# Altium PCB MB.PcbDoc
Units mil, origin at the board's own origin, x right, y up, seen from the top; angles counter-clockwise.
Board outline 4133.86 x 4921.26 mil, 4 copper layers (Digital Layer, nMO Layer, MO Layer, GND Layer), stack 39.843 mil thick; 61 components, 78 nets, 387 pads, 0 vias.
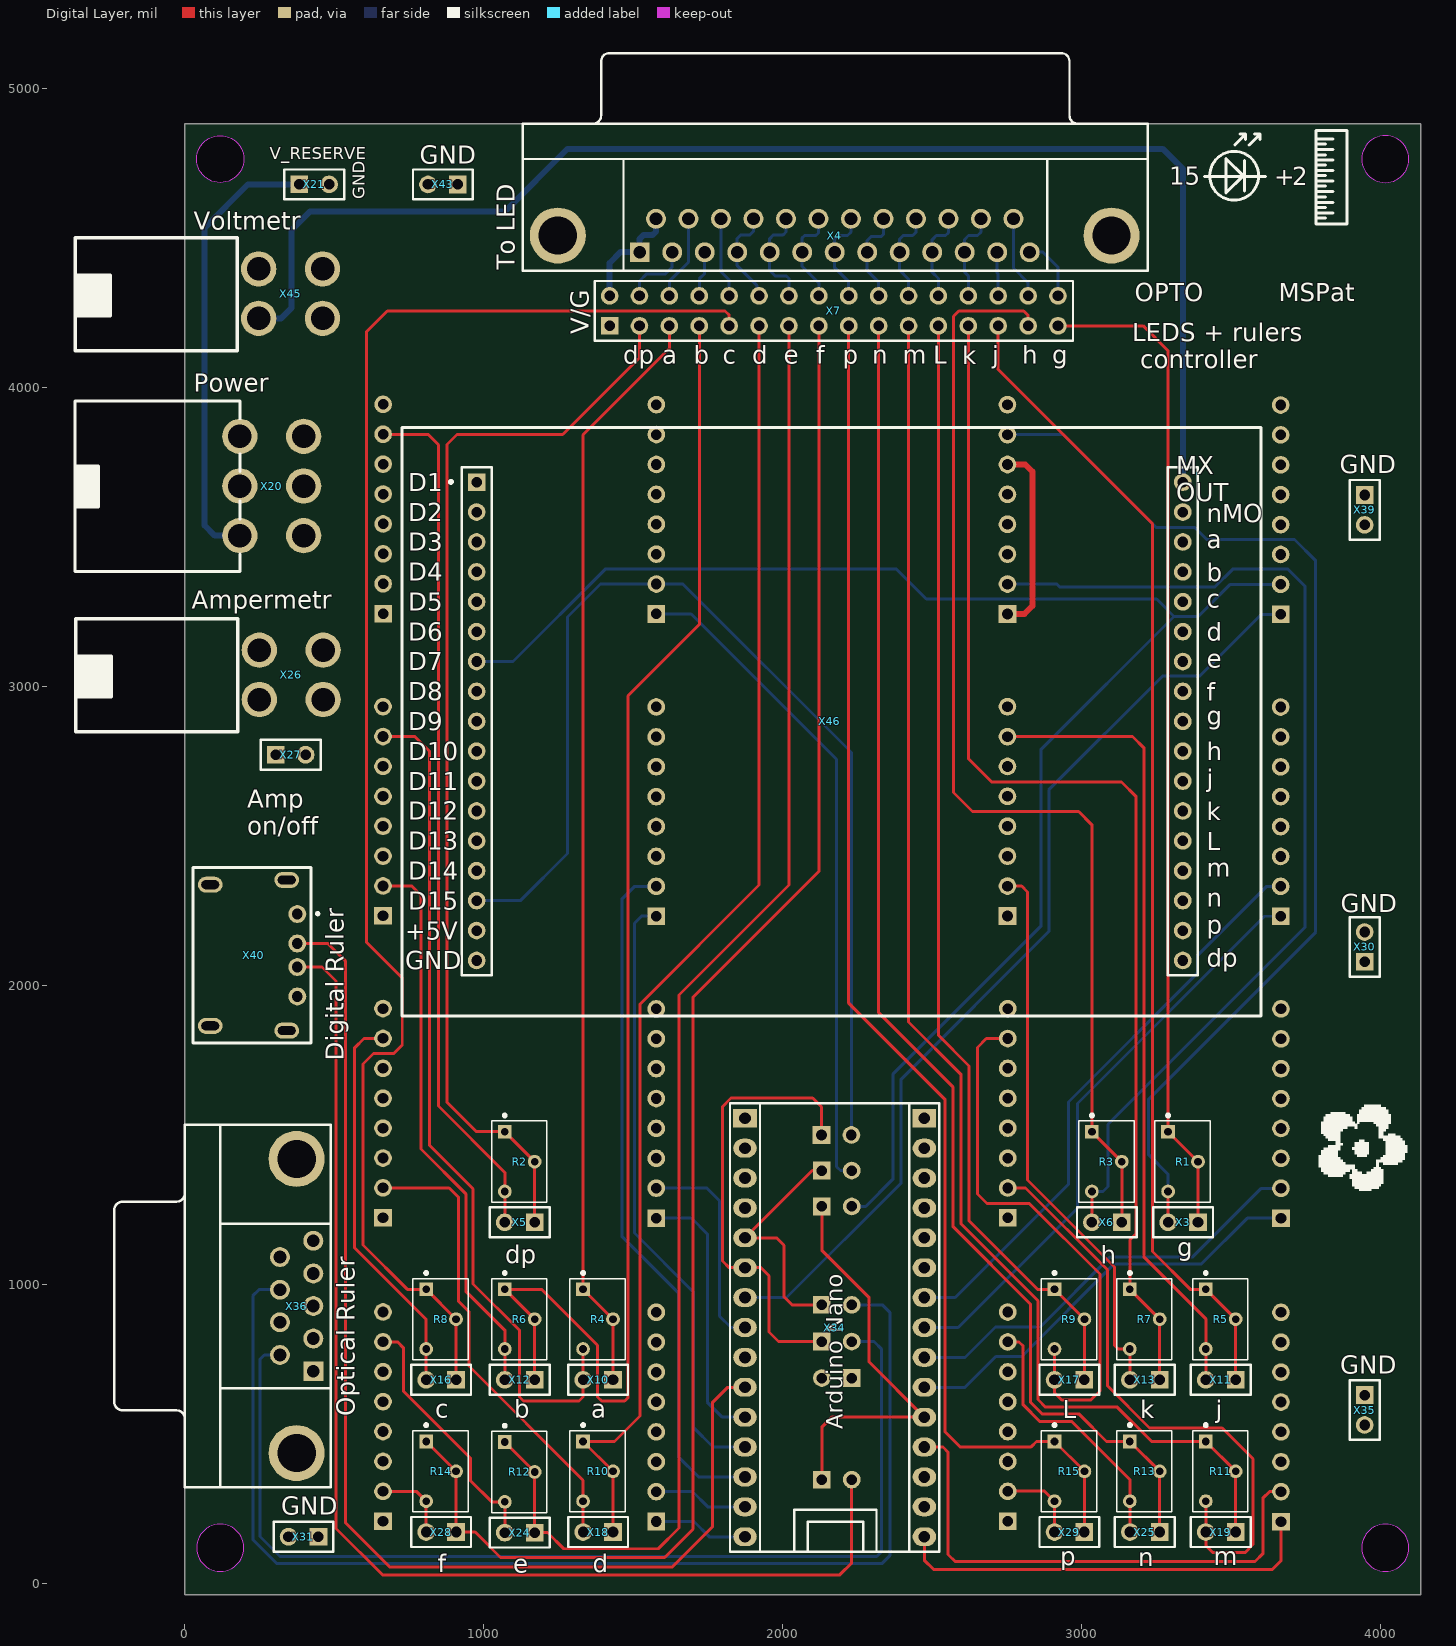
[diagram p0: Digital Layer view]
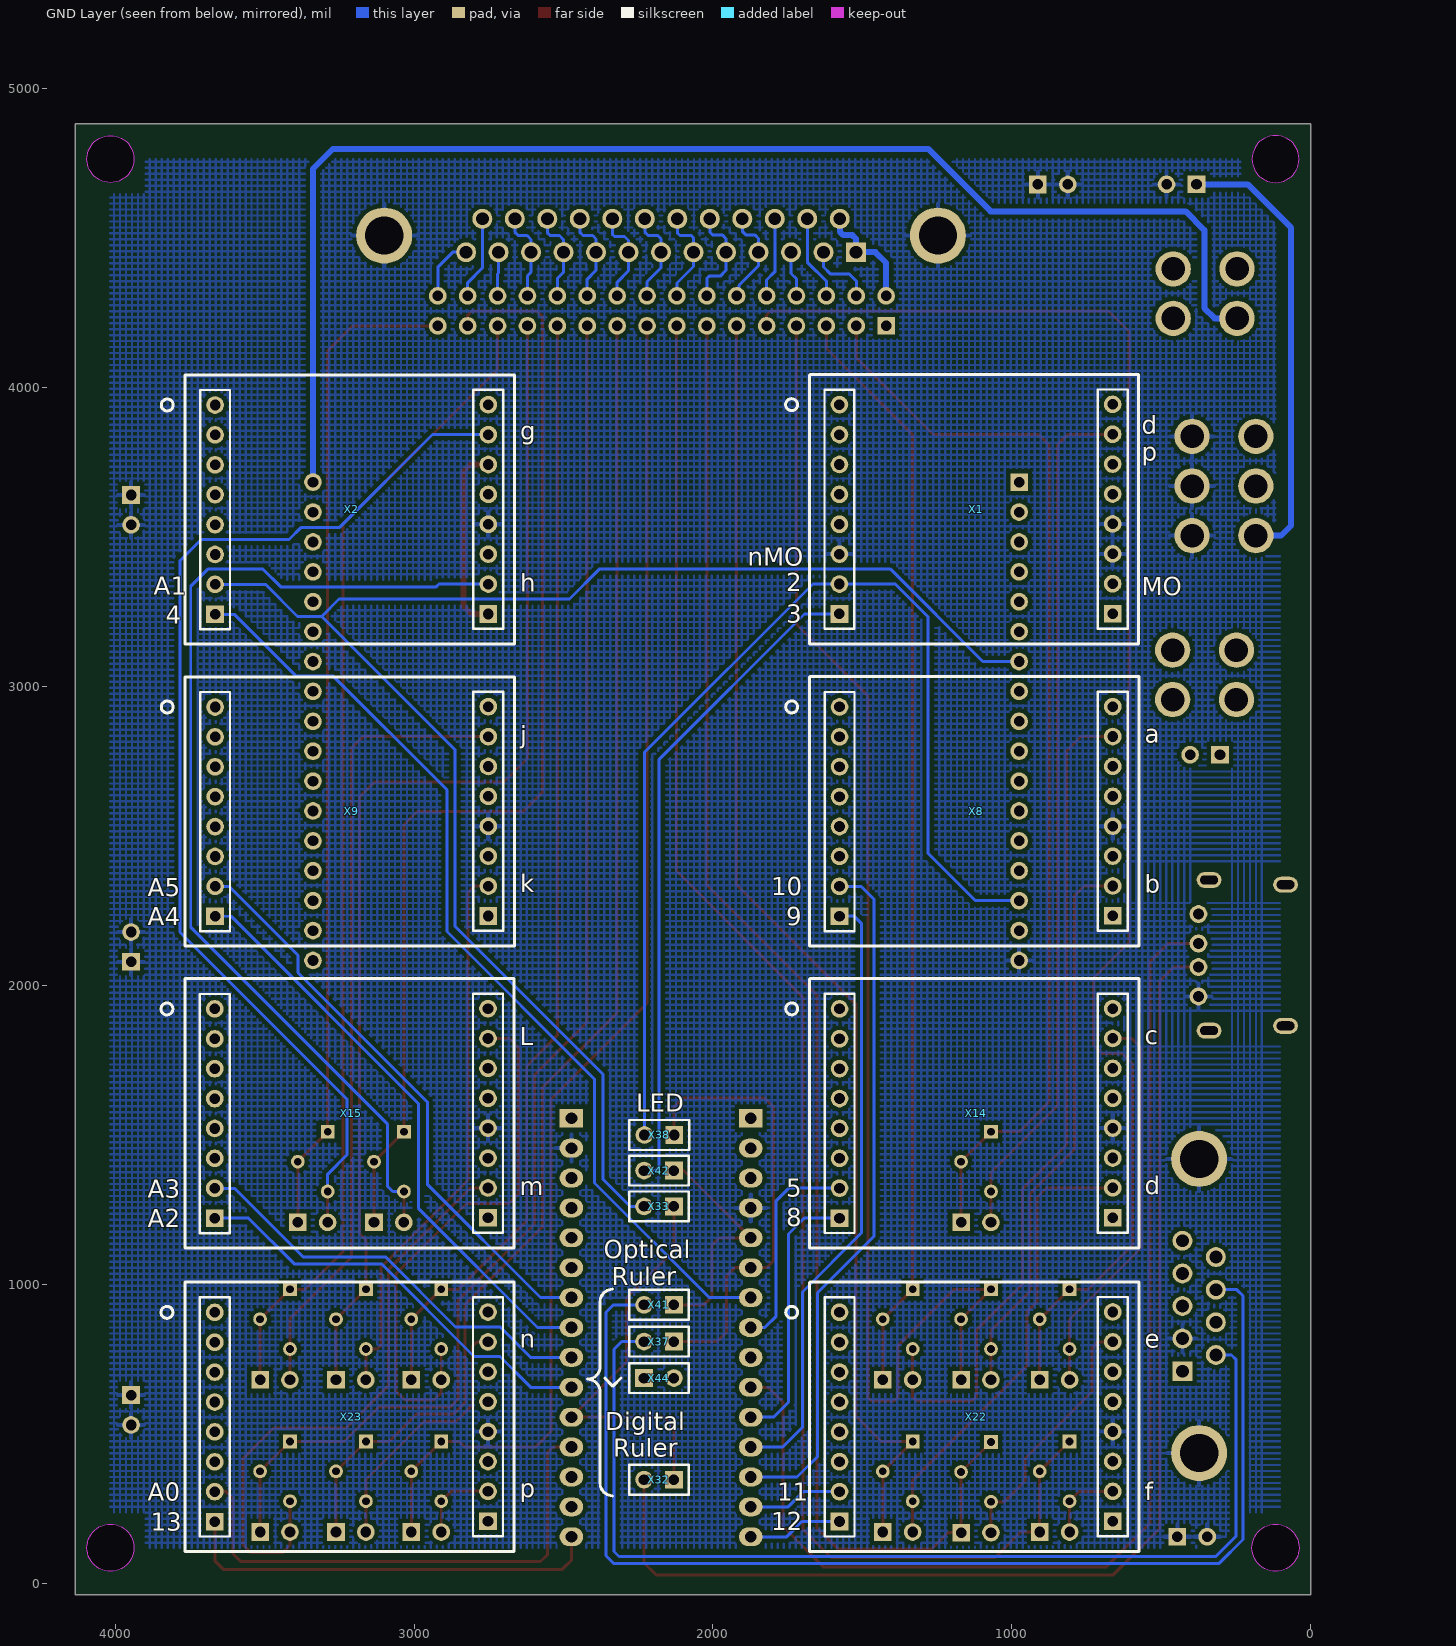
[diagram p1: GND Layer view, seen from below]
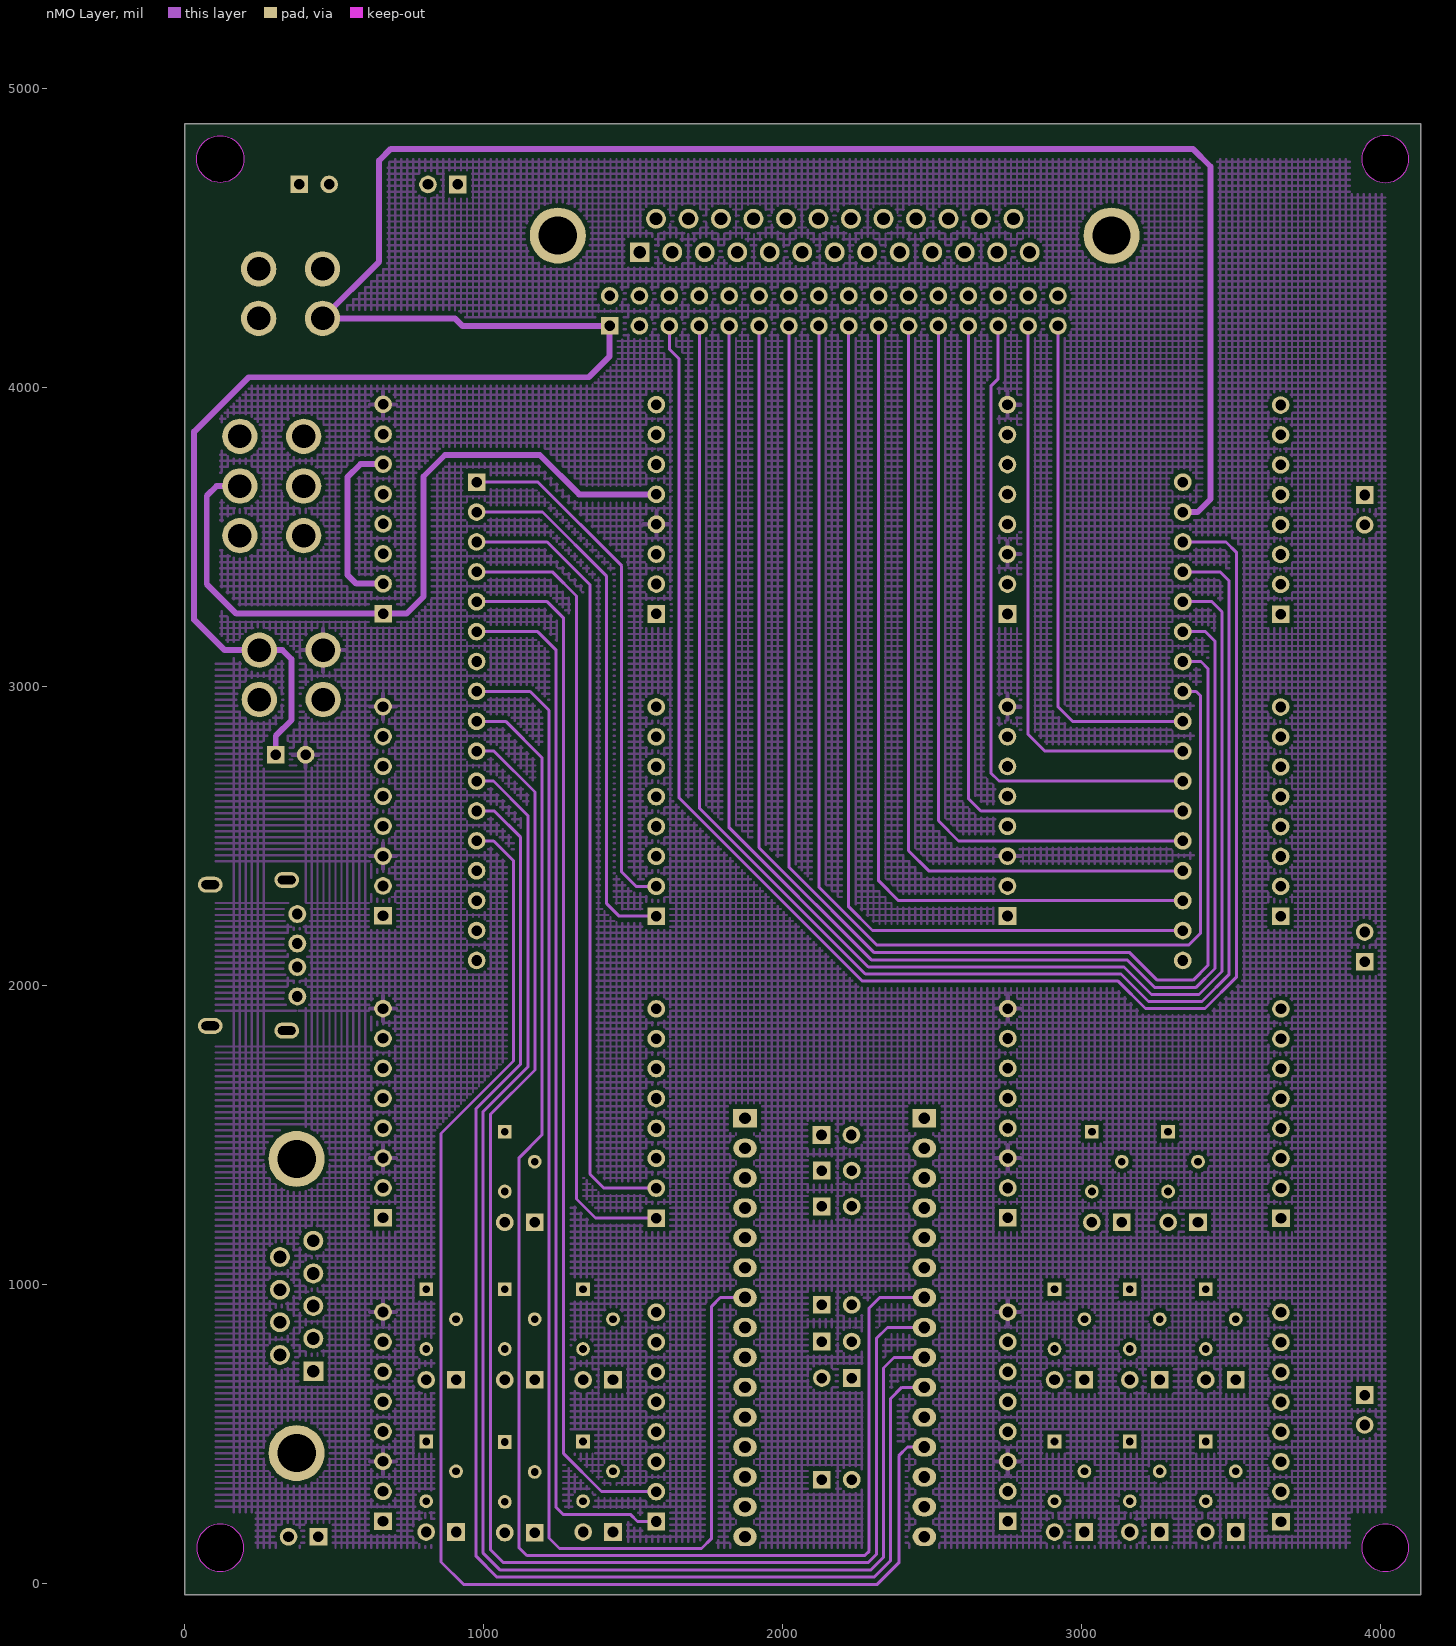
[diagram p2: nMO Layer]
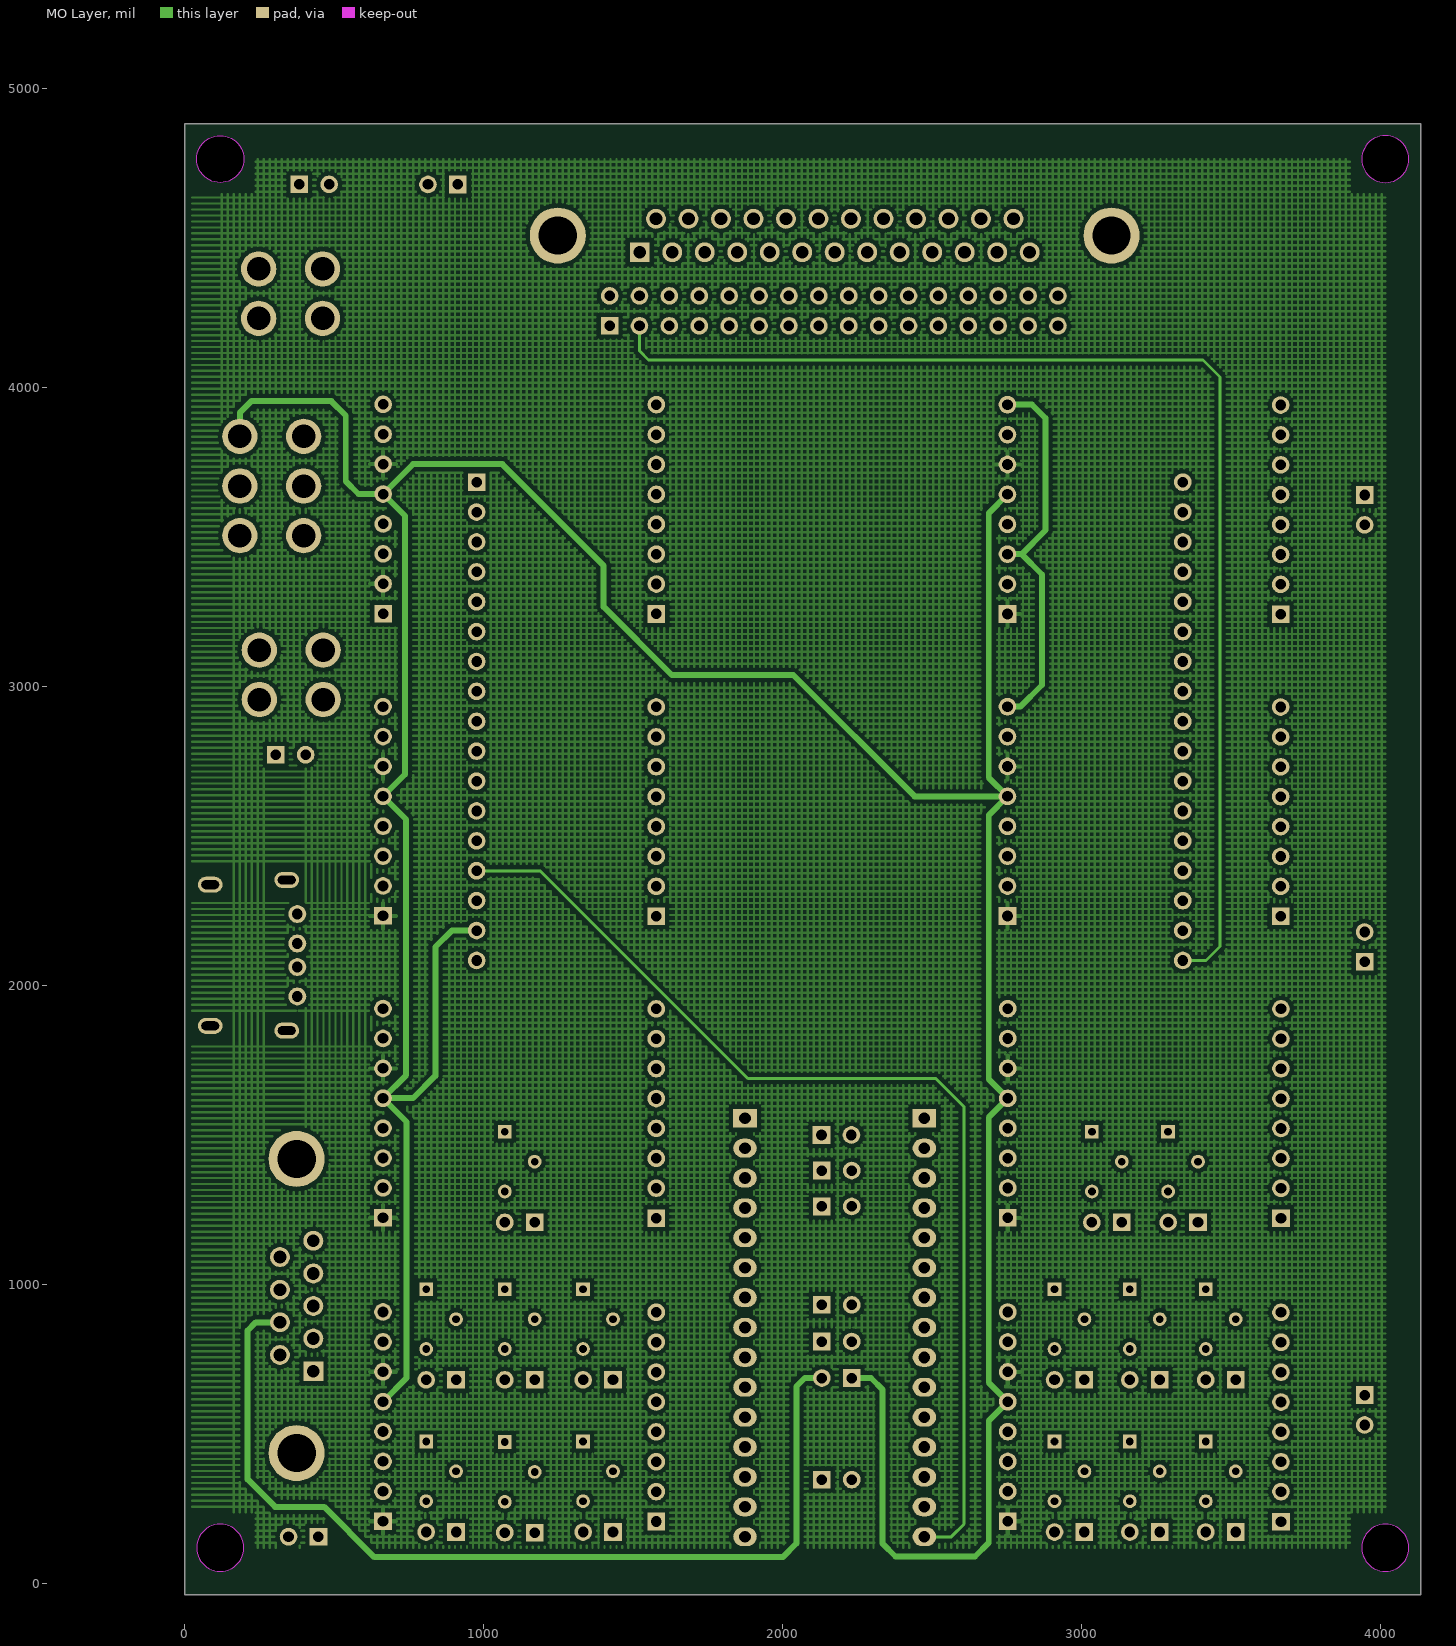
[diagram p3: MO Layer]

## Layer stack, top to bottom
Top Solder: solder mask 1, SM-001, Dk 4
Digital Layer: signal copper 0.7087
Dielectric 1: prepreg 4.5276, FR4 PR, Dk 4.2
nMO Layer: signal copper 0.7087
Dielectric 2: core 27.9528, FR4 Tg150, Dk 4.6
MO Layer: signal copper 0.7087
Dielectric 3: prepreg 4.5276, FR4 PR, Dk 4.2
GND Layer: signal copper 0.7087
Bottom Solder: solder mask 1, SM-001, Dk 4

## Board outline
0,4881.89 4133.86,4881.89 4133.86,-39.37 0,-39.37
cut-out: 3937.01,118.11 ccw(c4015.75,118.11) 4015.75,39.37 ccw(c4015.75,118.11) 4094.49,118.11 ccw(c4015.75,118.11) 4015.75,196.85 ccw(c4015.75,118.11)
cut-out: 3937.01,4763.78 ccw(c4015.75,4763.78) 4015.75,4685.04 ccw(c4015.75,4763.78) 4094.49,4763.78 ccw(c4015.75,4763.78) 4015.75,4842.52 ccw(c4015.75,4763.78)
cut-out: 118.11,4685.04 cw(c118.11,4763.78) 39.37,4763.78 cw(c118.11,4763.78) 118.11,4842.52 cw(c118.11,4763.78) 196.85,4763.78 cw(c118.11,4763.78)
cut-out: 39.37,118.11 ccw(c118.11,118.11) 118.11,39.37 ccw(c118.11,118.11) 196.85,118.11 ccw(c118.11,118.11) 118.11,196.85 ccw(c118.11,118.11)

## Design rules (kind name [scope] priority, off if disabled: settings)
AcuteAngle [All] p1: minimum=3.50000000000000E+0001 checktracksonly=FALSE
BoardOutlineClearance "BoardOutlineClearance 1" [All] p1: gap=9.84 ignorepadtopadclearanceinfootprint=FALSE except(0: Arc-SplitContinuation Track-SplitContinuation SMDPad-SplitContinuation THPad-SplitContinuation Via-SplitContinuation Fill-SplitContinuation Poly-SplitContinuation Region-SplitContinuation Text-SplitContinuation) // Milling
BoardOutlineClearance "BoardOutlineClearance 2" [All] p2: gap=15.75 ignorepadtopadclearanceinfootprint=FALSE except(0: Arc-SplitContinuation Track-SplitContinuation SMDPad-SplitContinuation THPad-SplitContinuation Via-SplitContinuation Fill-SplitContinuation Poly-SplitContinuation Region-SplitContinuation Text-SplitContinuation) // V-Cut
Clearance "Clearance 3 Oz" [All] p1: gap=13.78 ignorepadtopadclearanceinfootprint=FALSE except(9.84: Arc-Hole Track-Hole SMDPad-Hole THPad-Hole Via-Hole Fill-Hole Poly-Hole Region-Hole Text-Hole)
Clearance "Clearance 2 Oz" [All] p2: gap=11.81 ignorepadtopadclearanceinfootprint=FALSE except(9.84: Arc-Hole Track-Hole SMDPad-Hole THPad-Hole Via-Hole Fill-Hole Poly-Hole Region-Hole Text-Hole)
Clearance "Clearance-1 1 Oz" [All] p3: gap=7.87 ignorepadtopadclearanceinfootprint=FALSE except(9.84: Arc-Hole Track-Hole SMDPad-Hole THPad-Hole Via-Hole Fill-Hole Poly-Hole Region-Hole Text-Hole) // Standart
Clearance "Clearance-2 1 Oz" [All] p4: gap=5.91 ignorepadtopadclearanceinfootprint=FALSE except(7.87: Arc-Fill Arc-Poly Track-Fill Track-Poly SMDPad-Fill SMDPad-Poly THPad-Fill THPad-Poly Via-Fill Via-Poly Fill-Fill Fill-Poly Poly-Poly; 9.84: Arc-Hole Track-Hole SMDPad-Hole THPad-Hole Via-Hole Fill-Hole Poly-Hole Region-Hole Text-Hole) // Advance
Clearance "Clearance-1 1/2 Oz" [All] p5: gap=4.92 ignorepadtopadclearanceinfootprint=FALSE except(7.87: Arc-Fill Arc-Poly Track-Fill Track-Poly SMDPad-SMDPad SMDPad-Fill SMDPad-Poly THPad-Fill THPad-Poly Via-Fill Via-Poly Fill-Fill Fill-Poly Poly-Poly Poly-Region Poly-Text; 9.84: Arc-Hole Track-Hole SMDPad-Hole THPad-Hole Via-Hole Fill-Hole Poly-Hole Region-Hole Text-Hole) // Standart
Clearance "Clearance-2 1/2 Oz" [All] p6: gap=3.94 ignorepadtopadclearanceinfootprint=FALSE except(5.91: Arc-Fill Arc-Poly Track-Fill Track-Poly SMDPad-SMDPad SMDPad-Fill SMDPad-Poly THPad-Fill THPad-Poly Via-Fill Via-Poly Fill-Fill Fill-Poly Poly-Poly Poly-Region Poly-Text; 9.84: Arc-Hole Track-Hole SMDPad-Hole THPad-Hole Via-Hole Fill-Hole Poly-Hole Region-Hole Text-Hole) // Advance
DiffPairsRouting "DiffPairsRouting 1 Oz" [All] p1: maxlimit=10 minlimit=7.87 mostfreqgap=10 toplayer_minwidth=7.87 toplayer_maxwidth=15 toplayer_prefwidth=15 midlayer1_minwidth=7.87 midlayer1_maxwidth=15 midlayer1_prefwidth=15 midlayer2_minwidth=7.87 midlayer2_maxwidth=15 midlayer2_prefwidth=15 bottomlayer_minwidth=7.87 bottomlayer_maxwidth=15 bottomlayer_prefwidth=15 maxuncoupledlength=500
DiffPairsRouting "DiffPairsRouting 1/2 Oz" [All] p2: maxlimit=10 minlimit=3.94 mostfreqgap=10 toplayer_minwidth=3.94 toplayer_maxwidth=15 toplayer_prefwidth=15 midlayer1_minwidth=3.94 midlayer1_maxwidth=15 midlayer1_prefwidth=15 midlayer2_minwidth=3.94 midlayer2_maxwidth=15 midlayer2_prefwidth=15 bottomlayer_minwidth=3.94 bottomlayer_maxwidth=15 bottomlayer_prefwidth=15 maxuncoupledlength=500
HoleSize "Minimum HoleSize" [IsPad] p1: absolutevalues=TRUE maxlimit=232.28 minlimit=23.62 maxpercent=80.000 minpercent=20.000
HoleSize "Minimum HoleSize VIA 1" [IsVia] p2: absolutevalues=TRUE maxlimit=232.28 minlimit=11.81 maxpercent=80.000 minpercent=20.000 // Standart
HoleSize "Minimum HoleSize VIA 2" [IsVia] p3: absolutevalues=TRUE maxlimit=232.28 minlimit=7.87 maxpercent=80.000 minpercent=20.000 // Advance
HoleToHoleClearance Hole2HoleClearance [All] p1: gap=9.84 allowstackedmicrovias=FALSE
MinimumAnnularRing "Minimum AR VIA Standart" [IsVia] p1: minimumring=5.91
MinimumAnnularRing "Minimum AR PAD Standart" [IsPAD] p2: minimumring=7.87
MinimumAnnularRing "Minimum AR VIA Advance" [IsVia] p3: minimumring=3.94
MinimumAnnularRing "Minimum AR PAD Advance" [IsPAD] p4: minimumring=5.91
MinimumSolderMaskSliver "SolderMask Bridge Standart" [All] p1: minsoldermaskwidth=5.91 // All Masks
MinimumSolderMaskSliver "SolderMask Bridge Advance" [All] p2: minsoldermaskwidth=3.94 // Mask LDI
PlaneClearance "PlaneClearance 3 Oz" [All] p1: clearance=13.78
PlaneClearance "PlaneClearance 2 Oz" [All] p2: clearance=11.81
PlaneClearance "PlaneClearance 1 Oz" [All] p3: clearance=7.87
PlaneClearance "PlaneClearance-1 1/2 Oz" [All] p4: clearance=7.87 // Standart
PlaneClearance "PlaneClearance-2 1/2 Oz" [All] p5: clearance=5.91 // Advance
PlaneConnect "TermalConnect 3 Oz" [All] p1: planeconnectstyle=Relief reliefexpansion=7.87 reliefentries=4 reliefconductorwidth=13.78 reliefairgap=13.78 // Standart
PlaneConnect "TermalConnect 2 Oz" [All] p2: planeconnectstyle=Relief reliefexpansion=7.87 reliefentries=4 reliefconductorwidth=11.81 reliefairgap=11.81 // Standart
PlaneConnect "TermalConnect-1 1 Oz" [All] p3: planeconnectstyle=Relief reliefexpansion=7.87 reliefentries=4 reliefconductorwidth=7.87 reliefairgap=7.87 // Standart
PlaneConnect "TermalConnect-2 1 Oz" [All] p4: pad.planeconnectstyle=Relief pad.reliefexpansion=5.91 pad.reliefentries=4 pad.reliefconductorwidth=7.87 pad.reliefairgap=7.87 via.planeconnectstyle=Direct via.reliefexpansion=5.91 via.reliefentries=4 via.reliefconductorwidth=5.91 via.reliefairgap=5.91 // Advance
PlaneConnect "TermalConnect-1 1/2 Oz" [All] p5: planeconnectstyle=Relief reliefexpansion=7.87 reliefentries=4 reliefconductorwidth=7.87 reliefairgap=7.87 // Standart
PlaneConnect "TermalConnect-2 1/2 Oz" [All] p6: pad.planeconnectstyle=Relief pad.reliefexpansion=5.91 pad.reliefentries=4 pad.reliefconductorwidth=5.91 pad.reliefairgap=5.91 via.planeconnectstyle=Direct via.reliefexpansion=5.91 via.reliefentries=4 via.reliefconductorwidth=5.91 via.reliefairgap=5.91 // Advance
PolygonConnect "PolygonConnect 3 Oz" [All] p1: thpad.connectstyle=Relief thpad.reliefconductorwidth=13.78 thpad.reliefentries=4 thpad.polygonreliefangle="90 Angle" thpad.airgapwidth=13.78 smdpad.connectstyle=Relief smdpad.reliefconductorwidth=13.78 smdpad.reliefentries=4 smdpad.polygonreliefangle="90 Angle" smdpad.airgapwidth=13.78 via.connectstyle=Direct via.reliefconductorwidth=10 via.reliefentries=4 via.polygonreliefangle="90 Angle" via.airgapwidth=10
PolygonConnect "PolygonConnect 2 Oz" [All] p2: thpad.connectstyle=Relief thpad.reliefconductorwidth=11.81 thpad.reliefentries=4 thpad.polygonreliefangle="90 Angle" thpad.airgapwidth=11.81 smdpad.connectstyle=Relief smdpad.reliefconductorwidth=11.81 smdpad.reliefentries=4 smdpad.polygonreliefangle="90 Angle" smdpad.airgapwidth=11.81 via.connectstyle=Direct via.reliefconductorwidth=10 via.reliefentries=4 via.polygonreliefangle="90 Angle" via.airgapwidth=10
PolygonConnect "PolygonConnect-1 1 Oz" [All] p3: thpad.connectstyle=Relief thpad.reliefconductorwidth=7.87 thpad.reliefentries=4 thpad.polygonreliefangle="90 Angle" thpad.airgapwidth=7.87 smdpad.connectstyle=Relief smdpad.reliefconductorwidth=7.87 smdpad.reliefentries=4 smdpad.polygonreliefangle="90 Angle" smdpad.airgapwidth=7.87 via.connectstyle=Direct via.reliefconductorwidth=10 via.reliefentries=4 via.polygonreliefangle="90 Angle" via.airgapwidth=10 // Standart
PolygonConnect "PolygonConnect-2 1 Oz" [All] p4: thpad.connectstyle=Relief thpad.reliefconductorwidth=5.91 thpad.reliefentries=4 thpad.polygonreliefangle="90 Angle" thpad.airgapwidth=5.91 smdpad.connectstyle=Relief smdpad.reliefconductorwidth=5.91 smdpad.reliefentries=4 smdpad.polygonreliefangle="90 Angle" smdpad.airgapwidth=5.91 via.connectstyle=Direct via.reliefconductorwidth=10 via.reliefentries=4 via.polygonreliefangle="90 Angle" via.airgapwidth=10 // Advance
PolygonConnect "PolygonConnect-1 1/2 Oz" [All] p5: thpad.connectstyle=Relief thpad.reliefconductorwidth=5.91 thpad.reliefentries=4 thpad.polygonreliefangle="90 Angle" thpad.airgapwidth=7.87 smdpad.connectstyle=Relief smdpad.reliefconductorwidth=7.87 smdpad.reliefentries=4 smdpad.polygonreliefangle="90 Angle" smdpad.airgapwidth=7.87 via.connectstyle=Direct via.reliefconductorwidth=10 via.reliefentries=4 via.polygonreliefangle="90 Angle" via.airgapwidth=10 // Standart
PolygonConnect "PolygonConnect-2 1/2 Oz" [All] p6: thpad.connectstyle=Relief thpad.reliefconductorwidth=4.92 thpad.reliefentries=4 thpad.polygonreliefangle="90 Angle" thpad.airgapwidth=5.91 smdpad.connectstyle=Relief smdpad.reliefconductorwidth=4.92 smdpad.reliefentries=4 smdpad.polygonreliefangle="90 Angle" smdpad.airgapwidth=5.91 via.connectstyle=Direct via.reliefconductorwidth=10 via.reliefentries=4 via.polygonreliefangle="90 Angle" via.airgapwidth=10 // Advance
RoutingCorners [All] p1 off: cornerstyle=45-Degree minsetback=100 maxsetback=100
RoutingVias [All] p1: holewidth=11.81 width=23.62 viastyle="Through Hole" minholewidth=7.87 minwidth=15.75 maxholewidth=232.28 maxwidth=251.97
SilkToSilkClearance Silk2SilkClearance [All] p1 off: silktosilkclearance=5.91
SilkToSolderMaskClearance Silk2SolderMaskClearance [IsPad] p1 off: minsilkscreentomaskgap=5.91 clearancetoexposedcopper=TRUE
SolderMaskExpansion SolderMaskExpansion-1 [All] p1: expansion=1.97 // Standart
SolderMaskExpansion "SolderMaskExpansion LDI" [All] p2: expansion=0.98 // Advance
UnRoutedNet [All] p1: checkbadconnections=TRUE
Width "Width 3 Oz" [All] p1: maxlimit=20 minlimit=10 preferedwidth=10 checkconnectedcopper=TRUE
Width "Width 2 Oz" [All] p2: maxlimit=393.7 minlimit=10 preferedwidth=10 minimp=50.000000 maximp=50.000000 favimp=50.000000 checkconnectedcopper=TRUE
Width "Width 1 Oz" [All] p3: maxlimit=20 minlimit=10 preferedwidth=10 checkconnectedcopper=TRUE
Width "Width 1/2 Oz" [All] p4: maxlimit=20 minlimit=10 preferedwidth=10 checkconnectedcopper=TRUE
20 further rules are at their usual default settings.

## Components (designator, comment, footprint, x,y, rotation, side; value= is the part's Value field where it differs from the comment)
R1 "RES 3266W" "RES 3266W" 3289,1510 r270 top
R2 "RES 3266W" "RES 3266W" 1070,1510 r270 top
R3 "RES 3266W" "RES 3266W" 3034,1510 r270 top
R4 "RES 3266W" "RES 3266W" 1332,983 r270 top
R5 "RES 3266W" "RES 3266W" 3415,983 r270 top
R6 "RES 3266W" "RES 3266W" 1070,983 r270 top
R7 "RES 3266W" "RES 3266W" 3161,983 r270 top
R8 "RES 3266W" "RES 3266W" 807,983 r270 top
R9 "RES 3266W" "RES 3266W" 2909,983 r270 top
R10 "RES 3266W" "RES 3266W" 1332,474 r270 top
R11 "RES 3266W" "RES 3266W" 3415,474 r270 top
R12 "RES 3266W" "RES 3266W" 1070,472 r270 top
R13 "RES 3266W" "RES 3266W" 3161,474 r270 top
R14 "RES 3266W" "RES 3266W" 807,474 r270 top
R15 "RES 3266W" "RES 3266W" 2909,474 r270 top
X1 "MEZ_RELAY" MEZ_RELAY 1576.98,3942.23 r180 bottom
X2 "MEZ_RELAY" MEZ_RELAY 3665.62,3941.12 r180 bottom
X3 "GND" HDR1X2 3389,1207 r180 top
X4 "D Connector 25" DSUB1.385-2H25A 2173.62,4882.12 r0 top
X5 "GND" HDR1X2 1170,1207 r180 top
X6 "GND" HDR1X2 3134,1207 r180 top
X7 "Header 16X2" HDR2X16 1420.62,4206.12 r0 top
X8 "MEZ_RELAY" MEZ_RELAY 1576.62,2931.12 r180 bottom
X9 "MEZ_RELAY" MEZ_RELAY 3665.62,2930.87 r180 bottom
X10 "Header 2" HDR1X2 1432,680 r180 top
X11 "Header 2" HDR1X2 3515,680 r180 top
X12 "Header 2" HDR1X2 1170,680 r180 top
X13 "Header 2" HDR1X2 3261,680 r180 top
X14 "MEZ_RELAY" MEZ_RELAY 1576.62,1921.12 r180 bottom
X15 "MEZ_RELAY" MEZ_RELAY 3666.62,1920.87 r180 bottom
X16 "Header 2" HDR1X2 907,680 r180 top
X17 "GND" HDR1X2 3009,680 r180 top
X18 "Header 2" HDR1X2 1432,171 r180 top
X19 "GND" HDR1X2 3515,171 r180 top
X20 "Power" POWER 183.8,3836.12 r90 top
X21 "Header 2" HDR1X2 382.62,4679.12 r0 top
X22 "MEZ_RELAY" MEZ_RELAY 1576.62,906.12 r180 bottom
X23 "MEZ_RELAY" MEZ_RELAY 3666.62,905.87 r180 bottom
X24 "GND" HDR1X2 1170,169 r180 top
X25 "GND" HDR1X2 3261,171 r180 top
X26 "Ampermetr" AMP_VOLTMETER 462.31,3121.12 r270 top
X27 "Header 2" HDR1X2 303.8,2771.12 r0 top
X28 "GND" HDR1X2 907,171 r180 top
X29 "GND" HDR1X2 3009,171 r180 top
X30 "GND" HDR1X2 3946.62,2078.12 r90 top
X31 "GND" HDR1X2 446.62,155.12 r180 top
X32 "Digit_rul" HDR1X2 2130.62,346.12 r0 bottom
X33 "Relay" HDR1X2 2130.62,1260.12 r0 bottom
X34 "Arduino Nano" PCBComponent_1 2473.62,1555.12 r90 top
X35 "GND" HDR1X2 3946.62,629.12 r270 top
X36 "D Connector 9" DSUB1.385-2H9 -0.39,927.05 r90 top
X37 "Optic_rul" HDR1X2 2130.62,808.12 r0 bottom
X38 "Relay" HDR1X2 2129.62,1499.12 r0 bottom
X39 "GND" HDR1X2 3946.62,3640.12 r270 top
X40 "USB" USB 376,2238.17 r270 top
X41 "Optic_ruler" HDR1X2 2130.62,930.98 r0 bottom
X42 "Relay" HDR1X2 2130.62,1380.12 r0 bottom
X43 "GND" HDR1X2 913,4679 r180 top
X44 "Optic_rul" HDR1X2 2230.62,686 r180 bottom
X45 "Voltmetr" AMP_VOLTMETR 460.3,4396.35 r270 top
X46 "MX_MEZ" MX_MEZ 2157,2883 r0 top

## Footprints (in the part's own frame and the unit in brackets; to place one, negate y for a bottom-side part, rotate by r counter-clockwise, add the part's x,y. Pads: shape width x height; smd on the part's side, far side on the other; paste and mask are expansions set on the pad)
AMP_VOLTMETER [mm] "AMP_VOLTMETER"
  round 3 hole 2: 1(0,0) 2(0,-5.423) 3(4.2,-5.423) 4(4.2,0)
  silkscreen extent -2.66,-21 6.94,-7.25
AMP_VOLTMETR [mm]
  round 3 hole 2: 1(0,0) 2(0,-5.423) 3(4.2,-5.423) 4(4.2,0)
  silkscreen extent -2.66,-21 6.94,-7.25
DSUB1.385-2H9 [mm] "Connector; D Subminiature; 9 Position; Right Angle; Pitch 1.385 mm"
  rect 1.69x1.69 hole 1.09: 1(-5.54,-10.92)
  round 1.69 hole 1.09: 2(-2.77,-10.92) 3(0,-10.92) 4(2.77,-10.92) 5(5.54,-10.92) 6(-4.155,-8.08) 8(1.385,-8.08) 9(4.155,-8.08)
  round 1.69 hole 1.09 mask+0.102: 7(-1.385,-8.08)
  round 4.76 hole 3.26: 10(-12.495,-9.5) 11(12.495,-9.5)
  silkscreen extent -15.4,-12.4 15.4,6
DSUB1.385-2H25A [mm] "Connector; D Subminiature; 25 Position; Right Angle; Pitch 1.385 mm"
  rect 1.69x1.69 hole 1.09: 1(-16.566,-10.92)
  round 1.69 hole 1.09: 2(-13.805,-10.92) 3(-11.044,-10.92) 4(-8.283,-10.92) 5(-5.522,-10.92) 6(-2.761,-10.92) 7(0,-10.92) 8(2.761,-10.92) 9(5.522,-10.92) 10(8.283,-10.92) 11(11.044,-10.92) 12(13.805,-10.92) 13(16.566,-10.92) 14(-15.185,-8.08) 15(-12.424,-8.08) 16(-9.663,-8.08) 17(-6.902,-8.08) 18(-4.141,-8.08) 19(-1.38,-8.08) 20(1.381,-8.08) 21(4.142,-8.08) 22(6.903,-8.08) 23(9.664,-8.08) 24(12.425,-8.08) 25(15.186,-8.08)
  round 4.76 hole 3.26: 26(-23.526,-9.5) 27(23.526,-9.5)
  silkscreen extent -26.5,-12.5 26.6,6
HDR1X2 [mm] "Connector; Header; 2 Position"
  rect 1.5x1.5 hole 0.9: 1(0,0)
  round 1.5 hole 0.9: 2(2.54,0)
  silkscreen extent -1.27,-1.27 3.81,1.27
HDR2X16 [mm] "Connector; Header; 16x2 Position"
  rect 1.5x1.5 hole 0.9: 1(0,0)
  round 1.5 hole 0.9: 2(0,2.54) 3(2.54,0) 4(2.54,2.54) 5(5.08,0) 6(5.08,2.54) 7(7.62,0) 8(7.62,2.54) 9(10.16,0) 10(10.16,2.54) 11(12.7,0) 12(12.7,2.54) 13(15.24,0) 14(15.24,2.54) 15(17.78,0) 16(17.78,2.54) 17(20.32,0) 18(20.32,2.54) 19(22.86,0) 20(22.86,2.54) 21(25.4,0) 22(25.4,2.54) 23(27.94,0) 24(27.94,2.54) 25(30.48,0) 26(30.48,2.54) 27(33.02,0) 28(33.02,2.54) 29(35.56,0) 30(35.56,2.54) 31(38.1,0) 32(38.1,2.54)
  silkscreen extent -1.27,-1.27 39.37,3.81
MEZ_RELAY [mm] "мезонин реле"
  round 1.5 hole 0.9: 1(0,0) 2(0,-2.54) 3(0,-5.08) 4(0,-7.62) 5(0,-10.16) 6(0,-12.7) 7(0,-15.24) 10(23.216,-15.215) 11(23.216,-12.675) 12(23.216,-10.135) 14(23.216,-5.055) 15(23.216,-2.515) 16(23.216,0.025)
  rect 1.5x1.5 hole 0.9: 8(0,-17.78) 9(23.216,-17.755)
  round 1.5 hole 0.9 mask+0.102: 13(23.216,-7.595)
  silkscreen extent -4.57,-20.32 25.43,2.57
MX_MEZ [mm]
  rect 1.5x1.5 hole 0.9: 1(-30,20.32)
  round 1.5 hole 0.9: 2(-30,17.78) 3(-30,15.24) 4(-30,12.7) 5(-30,10.16) 6(-30,7.62) 7(-30,5.08) 8(-30,2.54) 9(-30,0) 10(-30,-2.54) 11(-30,-5.08) 12(-30,-7.62) 13(-30,-10.16) 14(-30,-12.7) 15(-30,-15.24) 16(-30,-17.78) 17(-30,-20.32) 18(30,-20.32) 19(30,-17.78) 20(30,-15.24) 21(30,-12.7) 22(30,-10.16) 23(30,-7.62) 24(30,-5.08) 25(30,-2.54) 26(30,0) 27(30,2.54) 28(30,5.08) 29(30,7.62) 30(30,10.16) 31(30,12.7) 32(30,15.24) 33(30,17.78) 34(30,20.32)
  silkscreen extent -36.35,-25.05 36.65,24.95
PCBComponent_1 [mm]
  rect 1.6x2 hole 1: 1(0,15.24) 30(0,0)
  oval 1.6x2 hole 1: 2(-2.54,15.24) 3(-5.08,15.24) 4(-7.62,15.24) 5(-10.16,15.24) 6(-12.7,15.24) 7(-15.24,15.24) 8(-17.78,15.24) 9(-20.32,15.24) 10(-22.86,15.24) 11(-25.4,15.24) 12(-27.94,15.24) 13(-30.48,15.24) 14(-33.02,15.24) 15(-35.56,15.24) 16(-35.56,0) 17(-33.02,0) 18(-30.48,0) 19(-27.94,0) 20(-25.4,0) 21(-22.86,0) 22(-20.32,0) 23(-17.78,0) 24(-15.24,0) 25(-12.7,0) 26(-10.16,0) 27(-7.62,0) 28(-5.08,0) 29(-2.54,0)
  silkscreen extent -36.83,-1.27 1.27,16.51
POWER [mm] "POWER"
  round 3 hole 2 mask+0.102: 1(0,0)
  round 3 hole 2: 2(-4.217,0) 3(-8.435,0) 4(0,-5.422) 5(-4.217,-5.422) 6(-8.435,-5.422)
  silkscreen extent -11.5,0 3,14
"RES 3266W" [mm]
  rect 1.168x1.168 hole 0.66: 1(0,0)
  round 1.168 hole 0.66: 2(2.54,2.54) 3(5.08,0)
  silkscreen extent -1.48,-1.12 5.99,3.58
USB [mm]
  round 1.52 hole 0.92: 1(0,0) 2(2.5,0) 3(4.5,0) 4(7,0)
  oval 1.35x2.1 hole 1.5 slot 0.75 at 0 deg: 5(-2.9,-0.9) 6(-2.5,-7.4) 7(9.5,-7.4) 8(9.9,-0.9)
  silkscreen extent -3.94,-8.87 10.94,1.83

## Part data
X3 X5 X6 X17 X19 X24 X25 X28 X29 X30 X31 X32 X33 X35 X37 X38 X39 X41 X42 X43 X44: library part "Header 2", "Header, 2-Pin", LatestRevisionDate=17-Jul-2002, LatestRevisionNote="Re-released for DXP Platform.", Publisher="Altium Limited"
X4: "Receptacle Assembly, 25 Position, Right Angle", PackageDocument=U, DatasheetDocument=19-Mar-1999, Gender=Receptacle, LatestRevisionDate=17-Jul-2002, LatestRevisionNote="Re-released for DXP Platform.", Orientation="Right Angle", PackageReference=787202, Positions=25, Published=15-Jun-2001, Publisher="Altium Limited"
X7: "Header, 16-Pin, Dual row", LatestRevisionDate=17-Jul-2002, LatestRevisionNote="Re-released for DXP Platform.", Publisher="Altium Limited"
X10 X11 X12 X13 X16 X18 X21 X27: "Header, 2-Pin", LatestRevisionDate=17-Jul-2002, LatestRevisionNote="Re-released for DXP Platform.", Publisher="Altium Limited"
X20: library part POWER
X26 X45: library part AMP_VOLTMETR
X34: library part Component_1
X36: "Receptacle Assembly, 9 Position, Right Angle", PackageDocument=O, DatasheetDocument=1-Sep-1999, Gender=Receptacle, LatestRevisionDate=17-Jul-2002, LatestRevisionNote="Re-released for DXP Platform.", Orientation="Right Angle", PackageReference=788750, Positions=9, Published=15-Jun-2001, Publisher="Altium Limited"

## Nets (pads, with @x,y where several pads share a name; then routed paths per layer and width w, separated by ;. In a path a pad name is that pad's centre, name@x,y a point inside that pad or via, vN(x,y) a via of type N, cw(c..) or ccw(c..) an arc to the next point about the centre after c; other vN are vias at no path point)
\M\O\: X1.5 X1.16 X2.11 X2.16 X8.11 X8.16 X9.11 X9.16 X14.11 X14.16 X15.11 X15.16 X22.11 X22.16 X23.11 X23.16 X26.1 X27.2 | length 1292.8
  MO Layer w20: X9.16 2794.53,2931.87 2867,3004.33 2867,3374 2798.88,3442.12 ; X2.11 2798.88,3442.12 ; X2.16 2833.88,3942.12 2879,3897 2879,3522.24 2798.88,3442.12
\M\O\_00: X4.1 X4.14 X7.2 | length 377.6
  GND Layer w20: X7.2 1420.62,4416.12 1456.7,4452.2 X4.1 1521.42,4496.91 1533.62,4509.12 1563.62,4509.12 1575.77,4521.26 X4.14
\M\O\_0: X7.1 X26.2 X27.1 X45.4 X46.33 | length 8570.1
  nMO Layer w20: X27.1 303.8,2834.3 356.62,2887.12 356.62,3091.12 326.62,3121.12 X26.2 132.62,3121.12 31,3222.74 31,3852 213,4034 1351,4034 1420.62,4103.62 X7.1 927.88,4206.12 903,4231 X45.4 650,4420.7 650,4759 689,4798 3372,4798 3431,4739 3431,3626 3388,3583 X46.33
a: R4.3 X8.15 X10.2 | length 2845
  Digital Layer w10: X8.15 768.88,2832.12 817.62,2783.38 817.62,1465.38 964,1319 964,1001 1119,846 1119,623 1133,609 1318,609 1332,623 X10.2 R4.3
A0: X23.7 X34.19 X46.13 | length 6402.6
  Digital Layer w10: X34.19 2473.68,455.17 2535.83,455.17 2553,438 2553,95.74 2576.74,72 3580,72 3606,98 3606,284 3627.87,305.87 X23.7
  nMO Layer w10: X46.13 1033,2483 1099.41,2416.59 1099.41,1746.3 857,1503.89 857,71 932,-4 2316,-4 2388,68 2388,426 2417.12,455.12 X34.19
A1: X32.1 X33.1 X34.20 | length 1379.5
  Digital Layer w10: X32.1 2130.62,521.62 2164.12,555.12 X34.20 2289,739.74 2289,955 2130.62,1113.38 X33.1
A1_relay: X2.7 X33.2 X46.7 | length 5376.2
  GND Layer w10: X46.7 1097.37,3083 1407.37,3393 2379,3393 2480,3292 3251,3292 3309,3234 ; X33.2 2277.12,1260.12 2368,1351 2368,1702 2863,2197 2863,2788 3309,3234 ; X2.7 3497.22,3341.12 3390.1,3234 3309,3234
A1_ruler: X32.2 X40.3 | length 4064.2
  Digital Layer w10: X40.3 458.74,2061 505.62,2014.12 505.62,183.12 660.74,28 2191,28 2230.62,67.62 X32.2
A2: X15.8 X34.21 X46.12 | length 6186.8
  nMO Layer w10: X46.12 1035,2583 1123.19,2494.81 1123.19,1736.45 974.13,1587.39 974.13,89.87 1044,20 2305,20 2361,76 2361,618 2398.12,655.12 X34.21
  GND Layer w10: X34.21 2609.62,655.12 2712.62,758.12 2799.12,758.12 3109,1068 3401,1068 3553.87,1220.87 X15.8
A3: X15.7 X34.22 X46.11 | length 6339.8
  nMO Layer w10: X46.11 1032,2683 1146.97,2568.03 1146.97,1726.6 997.91,1577.54 997.91,100.09 1053.34,44.66 2295.29,44.66 2336.78,86.15 2336.78,719.78 2372.12,755.12 X34.22
  GND Layer w10: X34.22 2609.62,755.12 2711.62,857.12 2861.12,857.12 3095.78,1091.78 3371.78,1091.78 3600.87,1320.87 X15.7
A4: X9.8 X34.23 X46.10 | length 7033.2
  nMO Layer w10: X46.10 1034,2783 1170.75,2646.25 1170.75,1716.75 1021.69,1567.69 1021.69,112.31 1065.56,68.44 2285.44,68.44 2313,96 2313,818 2350.12,855.12 X34.23
  GND Layer w10: X34.23 2586.62,855.12 2985.62,1254.12 2985.62,1604.62 3611.87,2230.87 X9.8
A5: X9.7 X34.24 X46.9 | length 7101.1
  nMO Layer w10: X46.9 1073,2883 1194.53,2761.47 1194.53,1499.53 1118.31,1423.31 1118.31,117.69 1143.78,92.22 2274.22,92.22 2289,107 2289,920 2324.12,955.12 X34.24
  GND Layer w10: X34.24 2576.62,955.12 2955.62,1334.12 2955.62,1609.62 3388.1,2042.1 3388.1,2100.1 3618.87,2330.87 X9.7
a_00: X4.15 X7.6 | length 284.3
  GND Layer w10: X7.6 1620.62,4355.12 1684.47,4418.96 X4.15
a_0: R4.1 R4.2 X7.5 X10.1 X46.32 | length 9094.5
  Digital Layer w10: X10.1 R4.2 R4.1 1332,3841.5 1620.62,4130.12 X7.5
  nMO Layer w10: X7.5 1620.62,4128.38 1652,4097 1652,2628.11 2266.45,2013.66 3121.82,2013.66 3213.6,1921.88 3412.4,1921.88 3517.12,2026.6 3517.12,3448.88 3483,3483 X46.32
b: R6.3 X8.10 X12.2 | length 1877.2
  Digital Layer w10: X8.10 758.88,2332.12 790,2301 790,1452 939.78,1302.22 939.78,976.22 1070,846 R6.3 X12.2
b_00: X4.3 X7.8 | length 153.6
  GND Layer w10: X7.8 1720.62,4363.12 1738.82,4381.32 X4.3
b_0: R6.1 R6.2 X7.7 X12.1 X46.31 | length 9877.7
  Digital Layer w10: X12.1 R6.2 R6.1 1193,983 1380.31,795.69 1380.31,622.69 1394,609 1471,609 1482,620 1482,1182 1482,2968.5 1720.62,3207.12 X7.7
  nMO Layer w10: X7.7 1720.62,2593.12 2276.3,2037.44 3131.67,2037.44 3223.45,1945.66 3402.55,1945.66 3493.34,2036.45 3493.34,3352.66 3463,3383 X46.31
c: R8.3 X14.15 X16.2 | length 1317.5
  Digital Layer w10: X14.15 599.12,1822.12 568,1791 568,1121 807,882 R8.3 X16.2
c_00: X4.16 X7.10 | length 269.3
  GND Layer w10: X4.16 1793.17,4386.57 1820.62,4359.12 X7.10
c_0: R8.1 R8.2 X7.9 X16.1 X46.30 | length 10038.5
  Digital Layer w10: X16.1 R8.2 R8.1 744,983 596,1131 596,1737 631,1772 698.62,1772 727,1800.38 727,2024 608,2143 608,4187 677,4256 1807,4256 1820.62,4242.38 X7.9
  nMO Layer w10: X7.9 1820.62,2526.75 2286.15,2061.22 3141.52,2061.22 3233.3,1969.44 3392.7,1969.44 3469.56,2046.3 3469.56,3249.44 3436,3283 X46.30
d: R10.3 X14.10 X18.2 | length 1558
  Digital Layer w10: X14.10 883.88,1322.12 916,1290 916,942 950,908 950,726 1332,344 R10.3 X18.2
D2: X34.5 X41.1 X42.1 | length 801
  Digital Layer w10: X41.1 2030.65,930.98 2004,957.62 2004,1130 1978.88,1155.12 X34.5 2098.62,1380.12 X42.1
D2_relay: X1.8 X42.2 | length 2223.4
  GND Layer w10: X1.8 1693.77,3242.23 2180,2756 2180,2729.74 2180,1393 2192.88,1380.12 X42.2
D2_ruler: X36.8 X41.2 | length 4041.1
  GND Layer w10: X36.8 247.57,981.57 227.22,961.22 227.22,146.15 308.15,65.22 2331.22,65.22 2358,92 2358,906 2333.02,930.98 X41.2
D3: X34.6 X37.1 X38.1 | length 1520.7
  Digital Layer w10: X38.1 2129.62,1593.38 2100,1623 1827,1623 1798,1594 1798,1078 1820.88,1055.12 X34.6 1926.88,1055.12 1954,1028 1954,840 1985.88,808.12 X37.1
D3_relay: X1.7 X38.2 X46.15 | length 3668.6
  GND Layer w10: X46.15 1122,2283 1280,2441 1280,3232 1390.23,3342.23 X1.7 1665.77,3342.23 2229.62,2778.38 X38.2
D3_ruler: X36.6 X37.2 | length 3567.7
  GND Layer w10: X36.6 265.46,763.46 251,749 251,156 318,89 2314,89 2331,106 2331,782 2304.88,808.12 X37.2
D4: X2.8 X34.7 X46.8 | length 7729.6
  nMO Layer w10: X46.8 1155,2983 1218.31,2919.69 1218.31,150.69 1253,116 1728,116 1762,150 1762,926 1791.12,955.12 X34.7
  GND Layer w10: X34.7 2012.62,955.12 2396,1338.5 2396,1686 2890,2180 2890,2654 3270,3034 3394,3034 3601.12,3241.12 X2.8
D5: X14.7 X34.8 X46.3 | length 3367.5
  nMO Layer w10: X46.3 1212,3483 1355,3340 1355,1368 1401.88,1321.12 X14.7
  GND Layer w10: X14.7 1746.62,1321.12 1788.62,1279.12 1788.62,893.12 1826.62,855.12 X34.8
D7: X34.10 X40.2 | length 3954.4
  Digital Layer w10: X40.2 478,2139.74 537.62,2080.12 537.62,201.12 684.15,54.59 1631.09,54.59 1765.62,189.12 1765.62,605.12 1815.62,655.12 X34.10
D8: X14.8 X34.11 X46.4 | length 3580.4
  nMO Layer w10: X46.4 1229,3383 1310,3302 1310,1285 1373.88,1221.12 X14.8
  GND Layer w10: X14.8 1694.62,1221.12 1747.62,1168.12 1747.62,605.12 1797.62,555.12 X34.11
D9: X8.8 X34.12 X46.2 | length 3853
  nMO Layer w10: X46.2 1196,3583 1411,3368 1411,2273 1452.88,2231.12 X8.8
  GND Layer w10: X8.8 1527.62,2231.12 1503.62,2207.12 1503.62,1171.12 1700.62,974.12 1700.62,521.12 1766.62,455.12 X34.12
D10: X8.7 X34.13 X46.1 | length 4087.8
  nMO Layer w10: X46.1 1181,3683 1461,3403 1461,2379 1508.88,2331.12 X8.7
  GND Layer w10: X8.7 1504.62,2331.12 1461.62,2288.12 1461.62,1160.12 1650.62,971.12 1650.62,423.12 1718.62,355.12 X34.13
D11: X22.7 X34.14 X46.5 | length 3789.2
  nMO Layer w10: X46.5 1212,3283 1267,3228 1267,433 1393.88,306.12 X22.7
  GND Layer w10: X22.7 1697.62,306.12 1748.62,255.12 X34.14
D12: X22.8 X34.15 X46.6 | length 3831.9
  nMO Layer w10: X46.6 1180,3183 1242.09,3120.91 1242.09,252.91 1265,230 1490,230 1513.88,206.12 X22.8
  GND Layer w10: X22.8 1702.62,206.12 1753.62,155.12 X34.15
D13: X23.8 X34.16 X46.14 | length 4931
  Digital Layer w10: X34.16 2473.62,76.38 2504,46 3638,46 3666.62,74.62 X23.8
  MO Layer w10: X46.14 1188,2383 1883,1688 2512,1688 2606,1594 2606,197.12 2564,155.12 X34.16
d_00: X4.4 X4.17 X7.12 | length 328.3
  GND Layer w10: X4.17 1901.87,4522.37 1888.62,4509.12 1858.62,4509.12 1847.52,4498.02 1847.52,4407.22 1913.14,4341.6 1913.14,4313.6 X7.12
d_0: R10.1 R10.2 X7.11 X18.1 X46.29 | length 9088.2
  Digital Layer w10: X18.1 R10.2 R10.1 1437,474 1522,559 1522,1936.5 1920.62,2335.12 X7.11
  nMO Layer w10: X7.11 1920.62,2460.38 2296,2085 3151.37,2085 3243.15,1993.22 3382.85,1993.22 3445.78,2056.15 3445.78,3151.22 3414,3183 X46.29
dp: R2.3 X1.15 X5.2 | length 2892.6
  Digital Layer w10: X1.15 812.77,3843.23 848,3808 848,1596 1070,1374 R2.3 X5.2
dp_00: X4.2 X7.4 | length 228.3
  GND Layer w10: X7.4 1520.62,4356.12 1544.62,4380.12 1607.62,4380.12 1630.12,4402.61 X4.2
dp_0: R2.1 R2.2 X5.1 X7.3 X46.18 | length 7761.8
  Digital Layer w10: X5.1 R2.2 R2.1 975,1510 876.62,1608.38 876.62,3808.62 910.23,3842.23 1263.73,3842.23 1520.62,4099.12 X7.3
  MO Layer w10: X7.3 1520.62,4122.38 1551,4092 3406,4092 3463,4035 3463,2130 3416,2083 X46.18
e: R12.3 X22.15 X24.2 | length 860.9
  Digital Layer w10: X22.15 710.88,807.12 732,786 732,641 956,417 956,342 1026,272 R12.3 X24.2
e_00: X4.5 X4.18 X7.14 | length 347.5
  GND Layer w10: X4.18 2010.57,4520.07 1999.62,4509.12 1967.62,4509.12 1956.22,4497.72 1956.22,4391.52 1975.62,4372.12 2012.62,4372.12 2020.62,4364.12 X7.14
e_0: R12.1 R12.2 X7.13 X24.1 X46.28 | length 9529.1
  Digital Layer w10: R12.1 R12.2 X24.1 1213,169 1267,115 1583,115 1652.62,184.62 1652.62,1967.12 2020.62,2335.12 X7.13
  nMO Layer w10: X7.13 2020.62,2394.75 2306.37,2109 3161,2109 3253,2017 3373,2017 3422,2066 3422,3060 3399,3083 X46.28
f: R14.3 X22.10 X28.2 | length 261.1
  Digital Layer w10: X22.10 773.88,307.12 R14.3 X28.2
f_00: X4.6 X4.19 X7.16 | length 325.7
  GND Layer w10: X4.19 2119.27,4516.77 2110.62,4508.12 2072.62,4508.12 2064.92,4500.42 X4.6 2064.92,4404.82 2120.62,4349.12 X7.16
f_0: R14.1 R14.2 X7.15 X28.1 X46.27 | length 9523.1
  Digital Layer w10: R14.1 R14.2 X28.1 971,171 1056,86 1605,86 1699.62,180.62 1699.62,1960.12 2121.62,2382.12 X7.15@2121.62,4206.12
  nMO Layer w10: X7.15 2120.62,2328.38 2314.31,2134.69 3358.11,2134.69 3398,2174.58 3398,2968 3383,2983 X46.27
g: R1.3 X2.15 X3.2 | length 3677.4
  Digital Layer w10: X3.2 R1.3
  GND Layer w10: X2.15 2938.62,3842.12 3248.74,3532 3377,3532 3418,3491 3712,3491 3782.59,3420.41 3782.59,2177.7 3224,1619.11 3224,1433 3289,1368 R1.3
g_00: X4.13 X7.32 | length 211.5
  GND Layer w10: X4.13 2870.54,4452.2 2920.62,4402.12 X7.32
g_0: R1.1 R1.2 X3.1 X7.31 X46.26 | length 5072.3
  Digital Layer w10: X7.31 3205.62,4206.12 3289,4122.74 R1.1 R1.2 X3.1
  nMO Layer w10: X7.31 2920.62,2931.38 2969,2883 X46.26
GND: X1.6 X1.11 X1.12 X2.12 X4.26 X4.27 X8.12 X9.12 X14.12 X15.12 X20.4 X20.5 X20.6 X21.2 X22.12 X23.12 X30.1 X30.2 X31.1 X31.2 X34.4 X34.29 X35.1 X35.2 X36.2 X36.10 X36.11 X39.1 X39.2 X40.4 X43.1 X43.2 X46.17
h: R3.3 X2.10 X6.2 | length 3492.3
  Digital Layer w10: X6.2 R3.3
  GND Layer w10: X2.10 2916.88,3342.12 2926,3333 3446,3333 3505.12,3392.12 3689.88,3392.12 3747,3335 3747,2194 3088,1535 3088,1327 3071,1310 R3.3
h_00: X4.25 X7.30 | length 278.2
  GND Layer w10: X4.25 2771.48,4399.26 2820.62,4350.12 X7.30
h_0: R3.1 R3.2 X6.1 X7.29 X46.25 | length 5678.1
  Digital Layer w10: X7.29 2820.62,4241.38 2806,4256 2589,4256 2571,4238 2571,2722 2571,2645 2635,2581 2990,2581 3034,2537 R3.1 R3.2 X6.1
  nMO Layer w10: X7.29 2820.62,2839.38 2877,2783 X46.25
j: R5.3 X9.15 X11.2 | length 2671.8
  Digital Layer w10: X9.15 3170.13,2831.87 3209,2793 3209,2764 3209,1090 3415,884 R5.3 X11.2
j_00: X4.12 X7.28 | length 147.5
  GND Layer w10: X4.12 2717.13,4382.61 2720.62,4379.12 X7.28
j_0: R5.1 R5.2 X7.27 X11.1 X46.24 | length 6045.2
  Digital Layer w10: X7.27 2720.62,4060.12 3237,3543.74 3237,1109 3363,983 R5.1 R5.2 X11.1
  nMO Layer w10: X7.27 2720.62,4028.62 2696,4004 2696,2710 2723,2683 X46.24
k: R7.3 X9.10 X13.2 | length 1872.1
  Digital Layer w10: X9.10 2799.13,2331.87 2819,2312 2819,1348.63 3109.78,1057.85 3109.78,795.22 3122,783 R7.3 X13.2
k_00: X4.11 X4.24 X7.26 | length 303
  GND Layer w10: X7.26 2620.62,4373.12 2608.43,4385.31 X4.11 2608.43,4494.92 2621.62,4508.12 2651.62,4508.12 2662.78,4519.27 X4.24
k_0: R7.1 R7.2 X7.25 X13.1 X46.23 | length 6379.2
  Digital Layer w10: X7.25 2620.62,2758.38 2698.83,2680.17 3132.83,2680.17 3182.31,2630.69 3182.31,1169.69 3161,1148.39 R7.1 R7.2 X13.1
  nMO Layer w10: X7.25 2620.62,2625 2662.62,2583 X46.23
l: R9.3 X15.15 X17.2 | length 1836.8
  Digital Layer w10: X15.15 2680.87,1821.87 2651,1792 2651,1302 2682.83,1270.17 2824.83,1270.17 3061,1034 3061,643 3030.56,612.56 2933.31,612.56 2909,636.87 X17.2 R9.3
l_00: X4.10 X4.23 X7.24 | length 307.2
  GND Layer w10: X7.24 2520.62,4364.12 2499.72,4385.02 X4.10 2499.72,4494.22 2513.62,4508.12 2544.62,4508.12 2554.07,4517.57 X4.23
l_0: R9.1 R9.2 X7.23 X17.1 X46.22 | length 6262.9
  Digital Layer w10: X7.23 2520.62,1832.38 2623,1730 2623,1212 2852,983 R9.1 R9.2 X17.1
  nMO Layer w10: X7.23 2520.62,2550.38 2588,2483 X46.22
m: R11.3 X15.10 X19.2 | length 2037
  Digital Layer w10: X15.10 2812.13,1321.87 3086,1048 3086,660 3227,519 3470,519 3573,416 3573,129 3546,102 3439,102 3415,126 X19.2 R11.3
m_00: X4.9 X4.22 X7.22 | length 311.4
  GND Layer w10: X7.22 2420.62,4362.12 2391.02,4391.72 X4.9 2391.02,4496.52 2402.62,4508.12 2434.62,4508.12 2445.37,4518.87 X4.22
m_0: R11.1 R11.2 X7.21 X19.1 X46.21 | length 7436.4
  Digital Layer w10: X7.21 2420.62,1877.12 2597,1700.74 2597,1201 2853.62,944.38 2853.62,614.01 2878.85,588.78 3119.22,588.78 3234,474 R11.1 R11.2 X19.1
  nMO Layer w10: X7.21 2420.62,2450.38 2488,2383 X46.21
MO: X1.10 X1.14 X2.9 X2.14 X8.9 X8.14 X9.9 X9.14 X14.9 X14.14 X15.9 X15.14 X22.9 X22.14 X23.9 X23.14 | length 1232.4
  Digital Layer w20: X2.9 2808.12,3242.12 2834.65,3268.65 2834.65,3718.59 2811.12,3742.12 X2.14
  nMO Layer w20: X1.10 573.43,3343.23 543.62,3373.03 543.62,3699.62 587.23,3743.23 X1.14
MX_OUT: X45.3 X46.34 | length 4554.7
  GND Layer w20: X45.3 322,4231 356,4265 356,4526 419,4589 1071,4589 1280,4798 3271,4798 3338.1,4730.9 X46.34
n: R13.3 X23.15 X25.2 | length 890
  Digital Layer w10: X23.15 2790.13,806.87 2804,793 2804,596.37 2859.37,541 2967,541 3161,347 R13.3 X25.2
n_00: X4.8 X4.21 X7.20 | length 316.2
  GND Layer w10: X7.20 2320.62,4352.12 2282.32,4390.42 X4.8 2282.32,4491.82 2295.62,4505.12 2329.62,4505.12 2336.67,4512.17 X4.21
n_0: R13.1 R13.2 X7.19 X25.1 X46.20 | length 7444.1
  Digital Layer w10: X7.19 2320.62,1908.12 2570,1658.74 2570,1192 2829,933 2829,605 2869,565 2992,565 3083,474 R13.1 R13.2 X25.1
  nMO Layer w10: X7.19 2320.62,2349.38 2387,2283 X46.20
p: R15.3 X23.10 X29.2 | length 272.6
  Digital Layer w10: X23.10@2753.25,307.49 2875.51,307.49 R15.3 X29.2
p_00: X4.7 X4.20 X7.18 | length 318.6
  GND Layer w10: X7.18 2220.62,4353.12 2173.62,4400.12 2173.62,4497.12 2184.62,4508.12 2216.62,4508.12 2227.97,4519.47 X4.20
p_0: R15.1 R15.2 X7.17 X29.1 X46.19 | length 7666.3
  Digital Layer w10: X7.17 2220.62,3203.12 2220.62,1940.12 2542,1618.74 2542,507 2593,456 2831,456 2849,474 R15.1 R15.2 X29.1
  nMO Layer w10: X7.17 2220.62,2262.38 2300,2183 X46.19
V_LED: X1.4 X1.9 X20.2 | length 2474.3
  nMO Layer w20: X20.2 106.07,3670.07 73,3637 73,3342 171.77,3243.23 X1.9 741.23,3243.23 798,3300 798,3702 870,3774 1186.96,3774 1318.73,3642.23 X1.4
V_MB: X1.13 X2.13 X8.13 X9.13 X14.13 X15.13 X20.1 X22.13 X23.13 X44.1 X46.16 | length 12244.9
  MO Layer w20: X20.1 183.8,3915.8 222,3954 490,3954 538,3906 538,3686 580.77,3643.23 X1.13 ; X22.13 742,686.5 742,1542.74 X14.13 ; X46.16 893,2183 838,2128 838,1697 763.12,1622.12 X14.13 ; X44.1 2295,686 2334,647 2334,132 2377,89 2643,89 2689,135 2689,543.24 X23.13 2689,670.49 2689,1558.24 X15.13 2689,1685.49 2689,2569.24 X9.13 ; X2.13 2689,3579.5 2689,2694.49 X9.13 ; X14.13 740,1699.5 740,2554.74 X8.13 736,2705.5 736,3570.21 X1.13 ; X1.13 762.98,3743.23 1061.77,3743.23 1401,3404 1401,3266.11 1629.11,3038 2035,3038 2441.13,2631.87 X9.13
V_MB_ruler: X36.7 X44.2 | length 3201.8
  MO Layer w20: X36.7 237.02,872.52 209.62,845.12 209.62,347.12 301.62,255.12 465.62,255.12 633.74,87 2000,87 2046,133 2046,658 2074,686 X44.2
V_RESERVE: X20.3 X21.1 | length 1504.6
  GND Layer w20: X20.3 99.97,3504.03 66,3538 66,4534 211.12,4679.12 X21.1
pads on no net: X1.1 X1.2 X1.3 X2.1 X2.2 X2.3 X2.4 X2.5 X2.6 X8.1 X8.2 X8.3 X8.4 X8.5 X8.6 X9.1 X9.2 X9.3 X9.4 X9.5 X9.6 X14.1 X14.2 X14.3 X14.4 X14.5 X14.6 X15.1 X15.2 X15.3 X15.4 X15.5 X15.6 X22.1 X22.2 X22.3 X22.4 X22.5 X22.6 X23.1 X23.2 X23.3 X23.4 X23.5 X23.6 X26.3 X26.4 X34.1 X34.2 X34.3 X34.9 X34.17 X34.18 X34.25 X34.26 X34.27 X34.28 X34.30 X36.1 X36.3 X36.4 X36.5 X36.9 X40.1 X40.5 X40.6 X40.7 X40.8 X45.1 X45.2

## Polygon pours and split planes (outlines as drawn)
MO on MO Layer "NONET_L02_P-001" (hatched 90Degree grid 20 track 8, remove dead copper, pour order 12): 41,4763.78 4015.75,4763.78 4015.75,118.11 41,118.11
\M\O\ on nMO Layer "NONET_L02_P-001" (hatched 90Degree grid 20 track 8, remove dead copper, pour order 8): 118.11,4763.78 4015.75,4763.78 4015.75,118.11 118.11,118.11
GND on GND Layer "NONET_L02_P-001" (hatched 90Degree grid 20 track 8, remove dead copper, pour order 14): 118.11,4763.78 4015.75,4763.78 4015.75,118.11 118.11,118.11

## Other copper
Digital Layer:
  pour cut-out: 4133.86,4881.89 3897.64,4881.89 3897.64,4645.67 4133.86,4645.67
  pour cut-out: 0,4881.89 236.22,4881.89 236.22,4645.67 0,4645.67
  pour cut-out: 0,0 0,236.22 236.22,236.22 236.22,0
  pour cut-out: 4133.86,0 4133.86,236.22 3897.64,236.22 3897.64,0
nMO Layer:
  pour cut-out: 0,236.22 236.22,236.22 236.22,0 0,0
  pour cut-out: 3897.64,236.22 4133.86,236.22 4133.86,0 3897.64,0
  pour cut-out: 4133.86,4881.89 3897.64,4881.89 3897.64,4645.67 4133.86,4645.67
  pour cut-out: 0,4881.89 236.22,4881.89 236.22,4645.67 0,4645.67
MO Layer:
  pour cut-out: 0,236.22 236.22,236.22 236.22,0 0,0
  pour cut-out: 3897.64,236.22 4133.86,236.22 4133.86,0 3897.64,0
  pour cut-out: 3897.64,4881.89 4133.86,4881.89 4133.86,4645.67 3897.64,4645.67
  pour cut-out: 0,4881.89 236.22,4881.89 236.22,4645.67 0,4645.67
GND Layer:
  pour cut-out: 0,236.22 236.22,236.22 236.22,0 0,0
  pour cut-out: 0,4881.89 236.22,4881.89 236.22,4645.67 0,4645.67
  pour cut-out: 3897.64,4881.89 4133.86,4881.89 4133.86,4645.67 3897.64,4645.67
  pour cut-out: 3897.64,236.22 4133.86,236.22 4133.86,0 3897.64,0

## Silkscreen, mask and mechanical layers (free items; w line width, h text height)
Top Overlay:
  drawing of 34 lines, arcs and shapes, not listed
  text "V_RESERVE" at 284,4764 h40
  text "15" at 3292.12,4677.12 h60
  text "+" at 3644.12,4676.12 h60
  text "2" at 3704.12,4676.12 h60
  text "GND" at 601,4629 h40 r90
  text "To LED" at 1104,4394 h60 r90
  text "OPTO" at 3177,4289 h60
  text "MSPat" at 3659,4289 h60
  text "V/G" at 1350.62,4178.12 h60 r90
  text "dp" at 1466.62,4079.12 h60
  text "a" at 1596.62,4079.12 h60
  text "b" at 1701.62,4079.12 h60
  text "c" at 1798.66,4079.12 h60
  text "d" at 1898.66,4079.12 h60
  text "e" at 2002.66,4079.12 h60
  text "f" at 2111.62,4079.12 h60
  text "p" at 2200.62,4079.12 h60
  text "n" at 2299.62,4079.12 h60
  text "m" at 2400.62,4079.12 h60
  text "L" at 2503.62,4079.12 h60
  text "j" at 2700.62,4079.12 h60
  text "h" at 2800.62,4079.12 h60
  text "g" at 2900.62,4079.12 h60
  text "k" at 2600.62,4078.12 h60
  text "LEDS + rulers /  controller" at 3169,4064 h60
  text "Amp / on/off" at 208,2504 h60
  text "Digital Ruler" at 531,1747 h60 r90
  text "g" at 3320,1093 h60
  text "dp" at 1071,1070 h60
  text "h" at 3063,1069 h60
  text "Optical Ruler" at 567.62,558.12 h60 r90
  text "c" at 837,554 h60
  text "b" at 1101,554 h60
  text "a" at 1359,554 h60
  text "j" at 3448,552 h60
  text "L" at 2937,551 h60
  text "k" at 3195,551 h60
  text "p" at 2929,59 h60
  text "m" at 3441,59 h60
  text "n" at 3189,57 h60
  text "f" at 846,37 h60
  text "d" at 1365,37 h60
  text "e" at 1099,35 h60
Bottom Overlay:
  lines w10: 2308,686 2335,659 2362,686 ; 2335.61,292.11 ccw(c2335.61,334.12) 2377.62,334.12 2377.62,640.12 cw(c2419.63,640.12) 2419.63,682.13 cw(c2419.62,724.13) 2377.61,724.13 ; 2335.62,983.13 cw(c2335.62,941.12) 2377.63,941.12 ; 2377.62,726.17 2377.62,940.12
  text "g" at 2644.62,3825.12 h60
  text "d / p" at 565.98,3754.23 h60
  text "nMO" at 1884,3403 h60
  text "2" at 1755,3318 h60
  text "h" at 2644.62,3316.12 h60
  text "A1" at 3870.63,3307.12 h60
  text "MO" at 565.98,3305 h60
  text "3" at 1755,3213 h60
  text "4" at 3830.64,3209.12 h60
  text "a" at 555.62,2812.12 h60
  text "j" at 2644.62,2807.87 h60
  text "k" at 2644.62,2311.87 h60
  text "b" at 555.62,2310.12 h60
  text "10" at 1804.61,2301.12 h60
  text "A5" at 3890.62,2298.12 h60
  text "9" at 1754.62,2201.12 h60
  text "A4" at 3890.62,2200.12 h60
  text "c" at 555.62,1803.12 h60
  text "L" at 2645.62,1798.87 h60
  text "LED" at 2256,1577 h60
  text "d" at 555.62,1300.12 h60
  text "m" at 2645.62,1296.87 h60
  text "5" at 1754.62,1292.12 h60
  text "A3" at 3890.62,1289.12 h60
  text "8" at 1754.62,1193.12 h60
  text "A2" at 3890.62,1191.12 h60
  text "Optical /  Ruler" at 2365,996 h60
  text "e" at 555.62,788.12 h60
  text "n" at 2645.62,786.87 h60
  text "Digital /  Ruler" at 2361,422 h60
  text "p" at 2645.62,287.87 h60
  text "f" at 555.62,277.12 h60
  text "11" at 1784.61,276.12 h60
  text "A0" at 3890.62,275.12 h60
  text "12" at 1804.61,176.12 h60
  text "13" at 3880.63,175.12 h60
Mechanical 1:
  circle w10: c118.11,118.11 r78.74
  circle w10: c4015.75,118.11 r78.74
  circle w10: c4015.75,4763.78 r78.74
  circle w10: c118.11,4763.78 r78.74
  lines w10: 0,-39.37 0,4881.89 4133.86,4881.89 4133.86,-39.37 0,-39.37

## Text inside footprints (layer, text, board x,y; h text height)
X46: Top Overlay "b" at 3417.71,3352.22 h60; Top Overlay "c" at 3417.71,3262.22 h60; Top Overlay "d" at 3417.71,3152.22 h60; Top Overlay "e" at 3417.71,3062.22 h60; Top Overlay "f" at 3417.71,2952.22 h60; Top Overlay "g" at 3417.71,2872.22 h60; Top Overlay "h" at 3417.71,2752.22 h60; Top Overlay "j" at 3417.71,2662.22 h60; Top Overlay "k" at 3417.71,2552.22 h60; Top Overlay "L" at 3417.71,2452.22 h60; Top Overlay "m" at 3417.71,2362.22 h60; Top Overlay "n" at 3417.71,2262.22 h60; Top Overlay "p" at 3417.71,2172.22 h60; Top Overlay "dp" at 3417.71,2062.22 h60; Top Overlay "+5V" at 737.59,2153.01 h60; Top Overlay "GND" at 737.59,2053.01 h60; Top Overlay "a" at 3417.71,3462.22 h60; Top Overlay "D1" at 747.68,3653.01 h60; Top Overlay "D2" at 747.68,3553.01 h60; Top Overlay "D3" at 747.68,3453.01 h60; Top Overlay "D4" at 747.68,3353.01 h60; Top Overlay "D5" at 747.68,3253.01 h60; Top Overlay "D6" at 747.68,3153.01 h60; Top Overlay "D7" at 747.68,3053.01 h60; Top Overlay "D8" at 747.68,2953.01 h60; Top Overlay "D9" at 747.68,2853.01 h60; Top Overlay "D11" at 747.68,2653.01 h60; Top Overlay "D10" at 747.68,2753.01 h60; Top Overlay "D12" at 747.68,2553.01 h60; Top Overlay "D13" at 747.68,2453.01 h60; Top Overlay "D14" at 747.68,2353.01 h60; Top Overlay "D15" at 747.68,2253.01 h60; Top Overlay "nMO" at 3417.87,3549.66 h60; Top Overlay "MX / OUT" at 3316.51,3619.99 h60